# Altium PCB Battery capacity meter_board.PcbDoc
Units mm, origin at the board's own origin, x right, y up, seen from the top; angles counter-clockwise.
Board outline 80 x 100 mm, 2 copper layers (Top Layer, Bottom Layer); 23 components, 12 nets, 50 pads, 7 vias.
Unrouted connection lines stored in the file: 1.
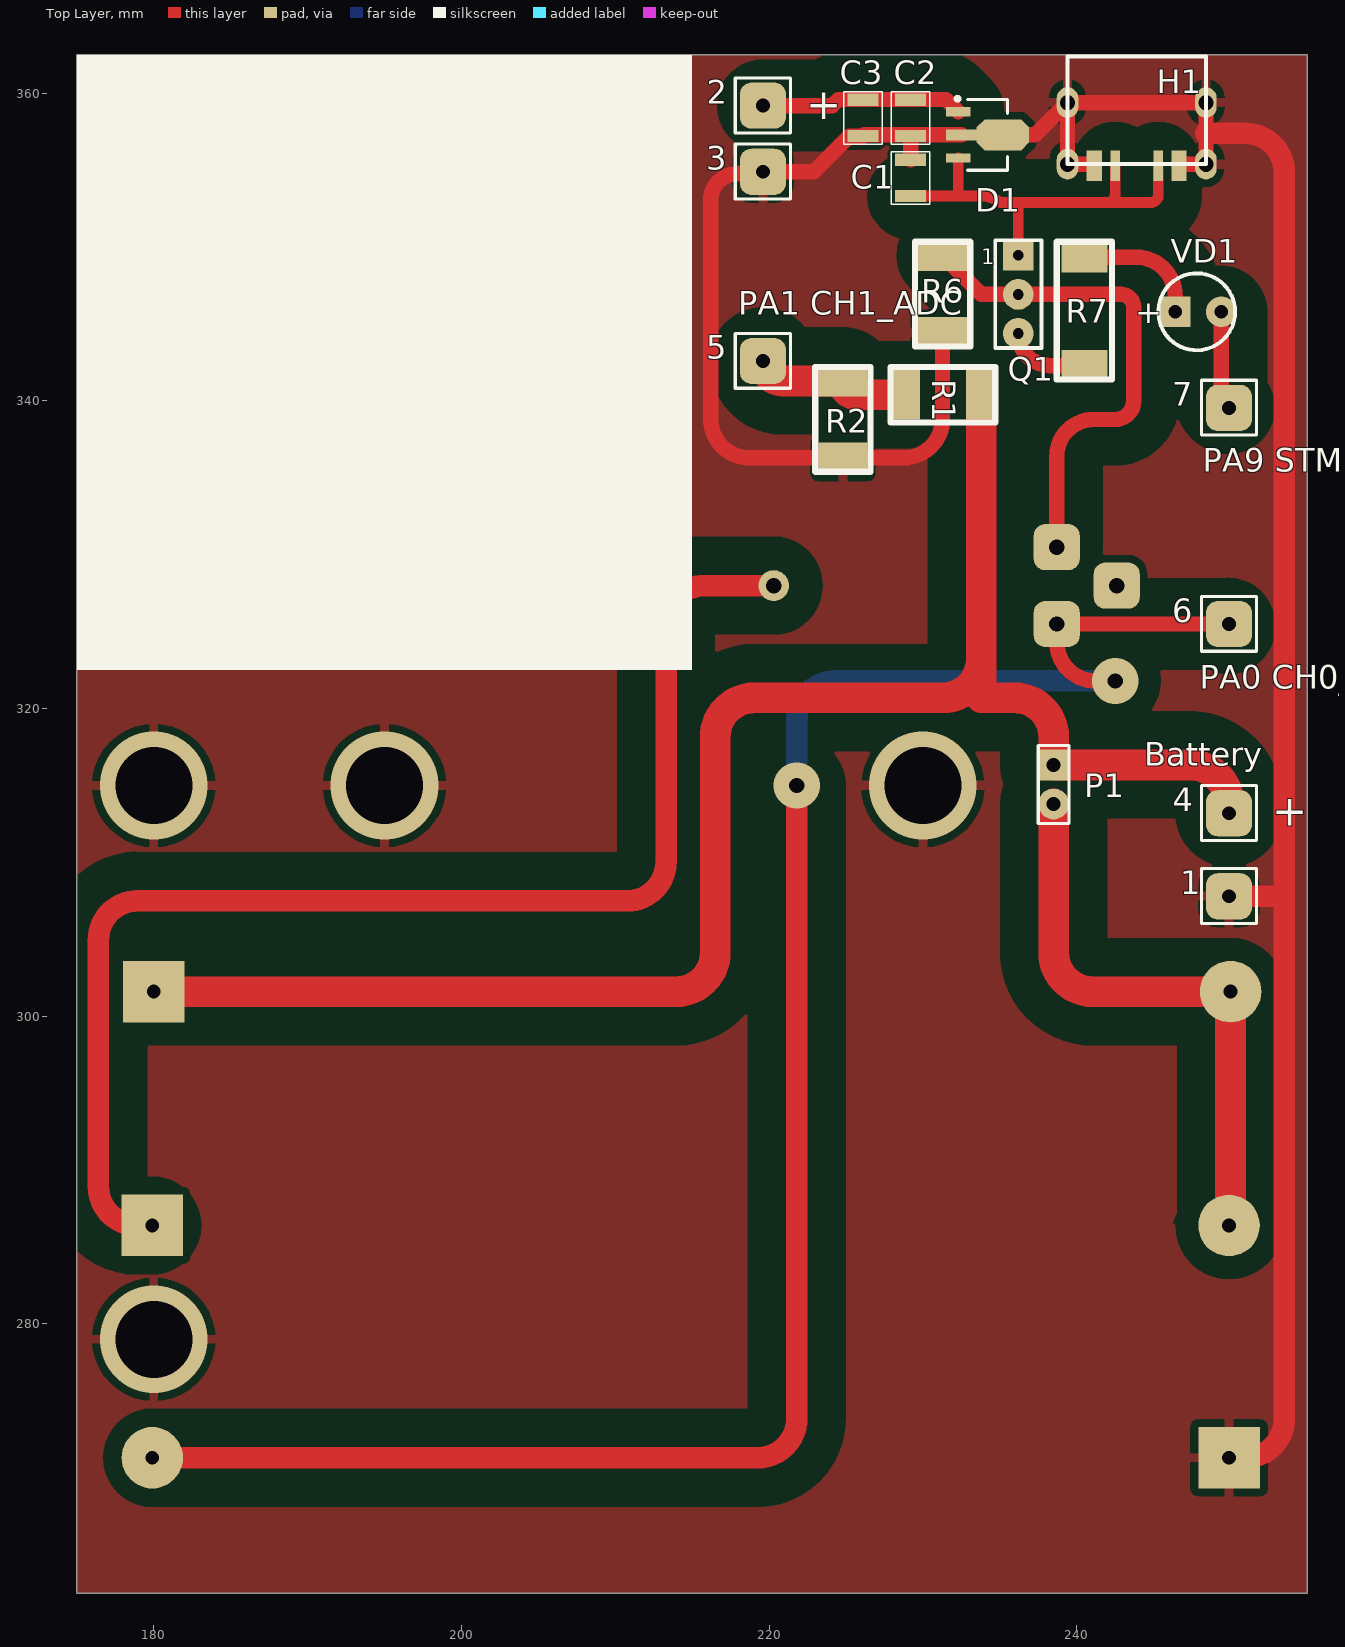
[diagram p0: Top Layer view]
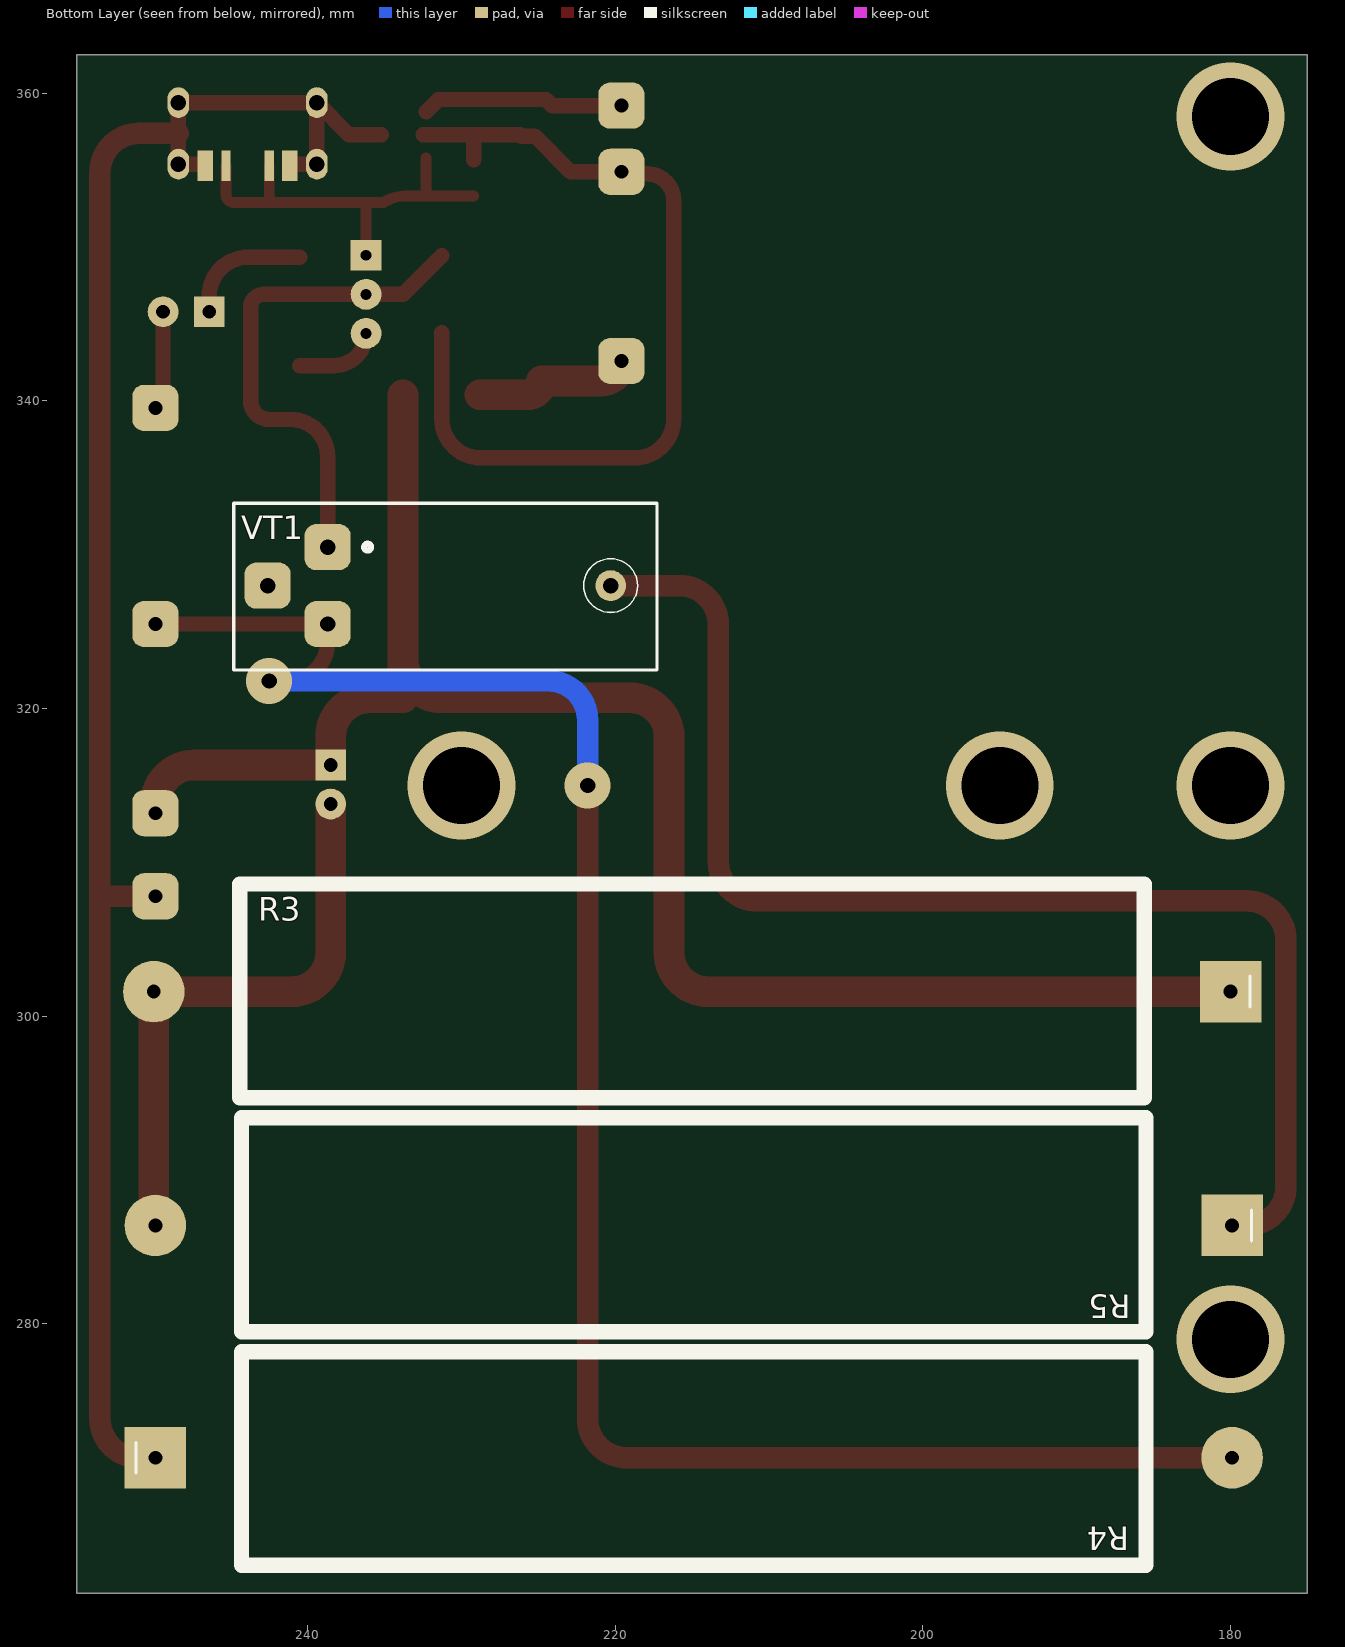
[diagram p1: Bottom Layer view, seen from below]

## Layer stack, top to bottom
Top Solder: solder mask 0.0102, Solder Resist, Dk 3.5
Top Layer: signal copper 0.0356
Dielectric 1: dielectric 0.32, FR-4, Dk 4.8
Bottom Layer: signal copper 0.0356
Bottom Solder: solder mask 0.0102, Solder Resist, Dk 3.5

## Board outline
175,262.5 175,362.5 255,362.5 255,262.5

## Design rules (kind name [scope] priority, off if disabled: settings)
Clearance [All] p1: gap=0.5 ignorepadtopadclearanceinfootprint=FALSE except(0: Arc-Hole Track-Hole SMDPad-Hole THPad-Hole Via-Hole Fill-Hole Poly-Hole Region-Hole Text-Hole; 2.5: Arc-Fill Arc-Poly Arc-Region Track-Fill Track-Poly Track-Region)
PlaneConnect [All] p1: planeconnectstyle=Relief reliefexpansion=0.508 reliefentries=4 reliefconductorwidth=1 reliefairgap=1
PolygonConnect [All] p1: connectstyle=Relief reliefconductorwidth=0.6 reliefentries=4 polygonreliefangle="90 Angle" airgapwidth=0.5
RoutingVias [All] p1: holewidth=0.711 width=1.27 viastyle="Through Hole" minholewidth=0.711 minwidth=1.27 maxholewidth=0.711 maxwidth=1.27
SolderMaskExpansion [All] p1: expansion=0.102
Width [All] p1: maxlimit=2 minlimit=0.2 preferedwidth=1 minimp=50.000000 maximp=50.000000 favimp=50.000000
29 further rules are at their usual default settings.

## Components (designator, comment, footprint, x,y, rotation, side; value= is the part's Value field where it differs from the comment)
1 "." HOLE 250,307.3 r90 top
2 "." HOLE 219.7,358.7 r90 top
3 "." HOLE 219.7,354.4 r90 top
4 "." HOLE 250,312.7 r90 top
5 "." HOLE 219.7,342.1 r90 top
6 "." HOLE 250,325 r90 top
7 "." HOLE 250,339.05 r90 top
C1 "Capacitor" C1206 229.2,354.5 r270 top
C2 "Capacitor" C1206 229.2,358.4 r90 top
C3 "Capacitor" C1206 226.1,358.4 r90 top
D1 "78L03" SOT89M 234.2,357.3 r0 top
H1 "USB Type-C" "USB TYPE-C" 239.4,355.4 r0 top (schematic designator H?)
P1 "Header 2" 2PIN 238.5,316.34 r270 top
Q1 "MPSA92" NPN 236.2,348.2 r180 top
R1 "Rezistor_10k" 2512 231.1,340 r0 top
R2 "Rezistor_10k" 2512 225.2,338.6 r90 top
R3 "Rezistor_Ceramic_20W" RESISTOR_CERAMIC_20W 187.5,294.1 r0 bottom
R4 "Rezistor_Ceramic_20W" RESISTOR_CERAMIC_20W 242.4,278.8 r180 bottom
R5 "Rezistor_Ceramic_20W" RESISTOR_CERAMIC_20W 187.4,278.9 r0 bottom
R6 "Rezistor_10k" 2512 231.675,346.75 r90 top
R7 "Rezistor_120" "FOR 120 OHM" 240.9,344.6 r90 top
VD1 "RED" LIGHT_DIODE 246.4,345.8 r0 top
VT1 "IRF640N" TO-220AB 237.3,328 r270 bottom

## Footprints (in the part's own frame and the unit in brackets; to place one, negate y for a bottom-side part, rotate by r counter-clockwise, add the part's x,y. Pads: shape width x height; smd on the part's side, far side on the other; paste and mask are expansions set on the pad)
2PIN [mm] "Connector; Header; 4 Position"
  rect 2x2 hole 0.9: 1(0,0)
  round 2 hole 0.9: 2(2.54,0)
  silkscreen extent -1.27,-1 3.8,1
2512 [mm] "Chip Capacitor, Body 2.0x1.3mm, IPC High Density"
  rect 2x3.2 smd: 1(-2.3,0.4) 2(2.7,0.4)
  silkscreen extent -3.2,-1.4 3.6,2.2, body extent -3,-1.2 3.4,2.03, height 1.4
C1206 [mm] "Chip Capacitor, Body 2.0x1.3mm, IPC High Density"
  rect 0.8x2 smd: 1(-1.177,0) 2(1.177,0)
  silkscreen extent -1.7,-1.25 1.7,1.25, body extent -1.4,-0.72 1.5,0.72, height 1.4
"FOR 120 OHM" [mm]
  rect 2x3 smd: 1(-2.3,0.4) 2(4.75,0.4)
  silkscreen extent -3.2,-1.4 5.75,2.2, body extent -3,-1.2 5.5,2.03, height 1.4
HOLE [mm] "Connector; Header; 4 Position"
  rrect50% 3x3 hole 0.9: 1(0.5,0.1)
  silkscreen extent -1.27,-1.7 2.3,1.9
LIGHT_DIODE [mm] "Connector; Header; 4 Position"
  rect 2x2 hole 0.9: 1(0,0)
  round 2 hole 0.9: 2(3,0)
  silkscreen extent -1.1,-2.5 3.9,2.5
NPN [mm] "TO, Flat Index; 3 In-Line, Axial Leads; Body Dia. 4.6mm; Leads 0.41 x 0.39 mm (max)"
  rect 2x2 hole 0.7: 1(0,-1.27)
  round 2 hole 0.7: 2(0,1.27) 3(0,3.81)
  silkscreen extent -1.5,-2.25 1.5,4.75
RESISTOR_CERAMIC_20W [mm] "Connector; Header; 4 Position"
  rect 4x4 hole 0.9: 1(-7.5,-7.5)
  round 4 hole 0.9: 2(62.5,-7.5)
  silkscreen extent -8.77,-14.5 56.9,-0.6, body extent -2.4,-15 57.4,-0.1, height 13
SOT89M [mm] "SOT89, 3-Leads, Body 4.5x2.4 mm, Pitch 1.5mm, Lead Span 4.1mm, IPC Low Density"
  rect 1.6x0.6 smd: 1(-1.9,1.5) 3(-1.9,-1.5)
  rect 2x0.7 smd: 2(-1.7,0)
  oct 3.4x2 smd: 2(1,0)
  silkscreen extent -2.07,-2.3 1.3,2.47, body extent -1.3,-2.3 1.3,2.3, height 1.6
TO-220AB [mm] "TO, Thru-Hole, Vertical, Heatsink Mounted; 3 In-Line Leads; Pitch 2.54 mm"
  rrect50% 3x3 hole 1: 1(-2.5,-1.4) 2(0,-5.3) 3(2.5,-1.4)
  round 2 hole 1: 2(0,17)
  silkscreen extent -5.35,-7.5 5.5,20, body extent -5.4,-7.5 5.4,20, height 5
"USB TYPE-C" [mm]
  oval 1.4x2 hole 1: 0(0,0) 0(0,4) 0(9,0) 0(9,4)
  rect 1x2 all layers, no hole: 1(1.75,-0.1) 1(7.25,-0.1)
  rect 0.6x2 all layers, no hole: 2(3.1,-0.1) 2(5.9,-0.1)
  silkscreen extent 0,0 9,7, body extent 0,0 9,7, height 4

## Part data
1 2 3 4 5 6 7: Part Number=КТ_DIP_1,1, ValueType="Контрольная точка"
P1: "Header, 2-Pin", LatestRevisionDate=17-Jul-2002, LatestRevisionNote="Re-released for DXP Platform.", Publisher="Altium Limited"
Q1: "PNP"
R1 R2 R6 R7: "Rezistor"
VD1: library part HER106
VT1: library part IRF740
D1: ComponentLink1Description="Manufacturer Link", ComponentLink1URL=http://www.zetex.com/, DatasheetVersion=Jan-1998, LatestRevisionDate=29-May-2009, LatestRevisionNote="IPC-7351 Footprint Added.", Note="Pin 2 is not connected and not drawn.", PackageDescription="3-Pin SOT-23 Package 0.95 mm Pitch, 2.3 mm Lead Span - Reverse Pinning", PackageReference=SOT23A, PackageVersion=1996, Published=8-Jun-2000, Publisher="Altium Limited"

## Via types
v1: diameter 7, hole 5, Top Layer to Bottom Layer, 5 vias
v2: diameter 3, hole 1, Top Layer to Bottom Layer, 2 vias

## Nets (pads, with @x,y where several pads share a name; then routed paths per layer and width w, separated by ;. In a path a pad name is that pad's centre, name@x,y a point inside that pad or via, vN(x,y) a via of type N, cw(c..) or ccw(c..) an arc to the next point about the centre after c; other vN are vias at no path point)
"+3.3 V": 2.1 C2.2 C3.2 D1.1 | length 13.2
  Top Layer w1: 2.1 224.1,359.2 224.5,359.6 231.5,359.6 D1.1
"+5 V USB": C1.2 D1.3 H1.2 Q1.1 | length 27.2
  Top Layer w0.7: C1.2 232.1,353.323 ; D1.3 232.3,353.523 cw(c232.1,353.523) 232.1,353.323 ; Q1.1 236.2,352.7 ccw(c236,352.7) 236,352.9 ; H1.2@242.5,355.3 242.5,353.4 cw(c242,353.4) 242,352.9 ; H1.2@245.3,355.3 245.3,353.4 cw(c244.8,353.4) 244.8,352.9 242,352.9 ; 232.1,353.323 233.66,353.323 cw(c233.66,350.783) 235.064,352.9 236,352.9 ; 236,352.9 242,352.9
GND: 1.1 3.1 C1.1 C2.1 C3.1 D1.2 H1.0 H1.1 R2.1 R4.1 R6.1 | length 179.8
  Top Layer w1: C1.1 C2.1 ; R6.1 231.275,338.84 cw(c228.735,338.84) 228.735,336.3 R2.1 218.74,336.3 cw(c218.74,338.84) 216.2,338.84 216.2,353.047 cw(c217.916,353.047) 217.916,354.763 cw(c218.74,352.36) 218.74,354.9 3.1 222.9,354.9 225.223,357.223 C3.1 226.177,357.3 D1.2@232.5,357.3 ; D1.2@235.2,357.3 237.3,357.3 H1.0@239.4,359.4 ; H1.1@241.15,355.3 ccw(c241.05,355.3) 241.05,355.4 239.4,355.4 H1.0@239.4,359.4 ; H1.1@246.65,355.3 cw(c246.75,355.3) 246.75,355.4 248.4,355.4 248.4,357.4 248.4,359.4 H1.0@239.4,359.4
  Top Layer w1.4: 248.4,357.4 250.96,357.4 cw(c250.96,354.86) 253.5,354.86 253.5,307.8 ; R4.1 250.96,271.3 ccw(c250.96,273.84) 253.5,273.84 253.5,307.8 ; 1.1@250.1,308 ccw(c250.1,307.8) 1.1 253.5,307.8
  other v1: 180,279 180,315 195,315 230,315 180,358.5
Net4_1: 4.1 P1.1 R1.2 R3.1 | length 113.3
  Top Layer w2: R3.1 213.96,301.6 ccw(c213.96,304.14) 216.5,304.14 216.5,318.16 cw(c219.04,318.16) 219.04,320.7 231.26,320.7 ccw(c231.26,323.24) 233.8,323.24 ; R1.2 233.8,323.24 ; 4.1 249.9,313.8 ccw(c247.36,313.8) 247.36,316.34 P1.1 238.5,318.16 ccw(c235.96,318.16) 235.96,320.7 233.8,320.7 233.8,323.24
Net5_1: 5.1 R1.1 R2.2 | length 10.5
  Top Layer w2: 5.1 ccw(c220.9,342.6) 220.9,341.3 R2.2 ccw(c225.7,341.3) 225.7,340.4 R1.1
Net6_1: 6.1 R4.2 VT1.3 | length 128.9
  Top Layer w1: v2(242.5,321.8) 241.24,321.8 cw(c241.24,324.34) 238.7,324.34 VT1.3 249.64,325.5 cw(c249.64,325.24) 249.9,325.24 6.1
  Top Layer w1.4: R4.2 219.26,271.3 ccw(c219.26,273.84) 221.8,273.84 v2(221.8,315)
  Bottom Layer w1.4: v2(221.8,315) 221.8,319.26 cw(c224.34,319.26) 224.34,321.8 v2(242.5,321.8)
Net7_1: 7.1 VD1.2 | length 6.5
  Top Layer w1: VD1.2 249.4,340.05 ccw(c249.9,340.05) 7.1
NetP1_2: P1.2 R3.2 R5.2 | length 37.9
  Top Layer w2: P1.2 238.5,304.14 ccw(c241.04,304.14) 241.04,301.6 R3.2 250,286.5 cw(c249.9,286.5) R5.2
NetQ1_2: Q1.2 R6.2 VT1.1 | length 33
  Top Layer w1: R6.2 233.795,346.93 Q1.2 242.87,346.93 cw(c242.87,346.1) 243.7,346.1 243.7,340 cw(c242.5,340) 242.5,338.8 241.1,338.8 ccw(c241.1,336.4) 238.7,336.4 VT1.1
NetQ1_3: Q1.3 R7.1 | length 5.5
  Top Layer w1: Q1.3 ccw(c238.29,344.39) 238.29,342.3 R7.1
NetR5_1: R5.1 VT1.2 | length 84.6
  Top Layer w1.4: R5.1 178.94,286.4 cw(c178.94,288.94) 176.4,288.94 176.4,304.96 cw(c178.94,304.96) 178.94,307.5 210.76,307.5 ccw(c210.76,310.04) 213.3,310.04 213.3,325.46 cw(c215.84,325.46) 215.84,328 VT1.2@220.3,328
NetR7_2: R7.2 VD1.1 | length 8.4
  Top Layer w1: R7.2 243.86,349.35 cw(c243.86,346.81) 246.4,346.81 VD1.1

## Polygon pours and split planes (outlines as drawn)
GND on Top Layer "Top Layer-No Net" (solid, remove dead copper, pour order 0): 255,262.5 255,362.5 175,362.5 175,262.5

## Silkscreen, mask and mechanical layers (free items; w line width, h text height)
Top Overlay:
  rectangle: 175,322.5 215,362.5
  text "+" at 222.4,358.3 h2
  text "PA1 CH1_ADC" at 218,345.6 h1.52
  text "PA9 STM" at 248.2,335.4 h1.52
  text "PA0 CH0_ADC" at 248,321.3 h1.52
  text "Battery" at 244.4,316.3 h1.52
  text "+" at 252.7,312.4 h2

## Text inside footprints (layer, text, board x,y; h text height)
Q1: Top Overlay "1" at 233.8,348.9 h1
VD1: Top Overlay "+" at 243.8,345.05 h1.52